# EAGLE board Kentec-pin-relayout (EAGLE 9.0.0)
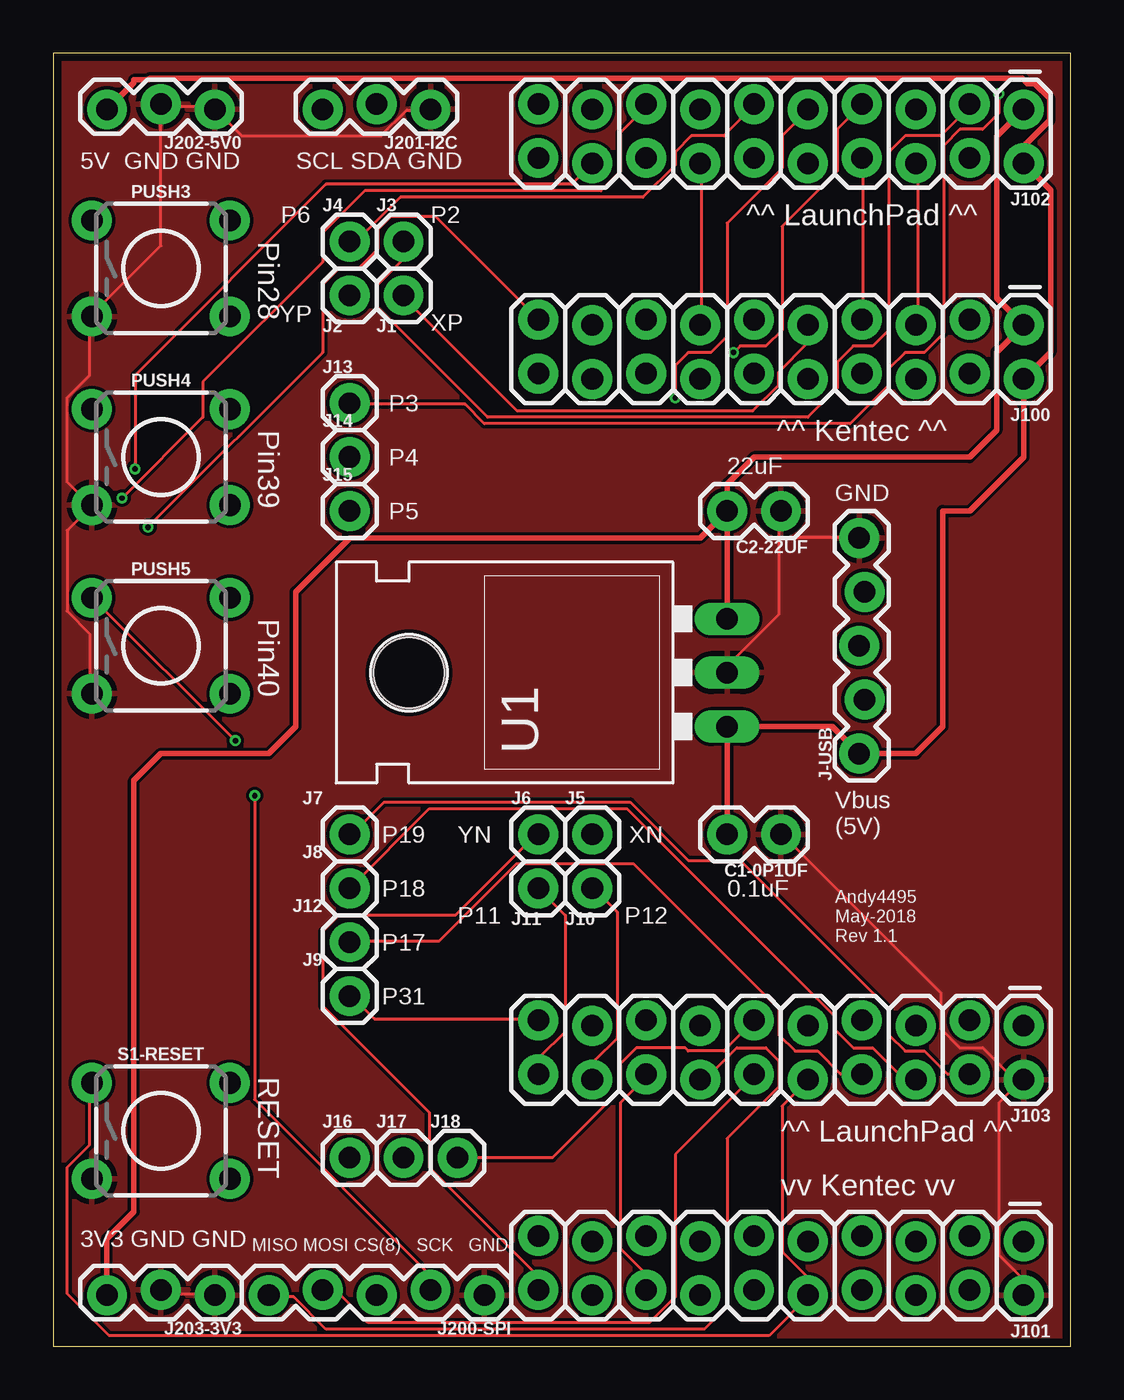
[diagram p0: board, top side]
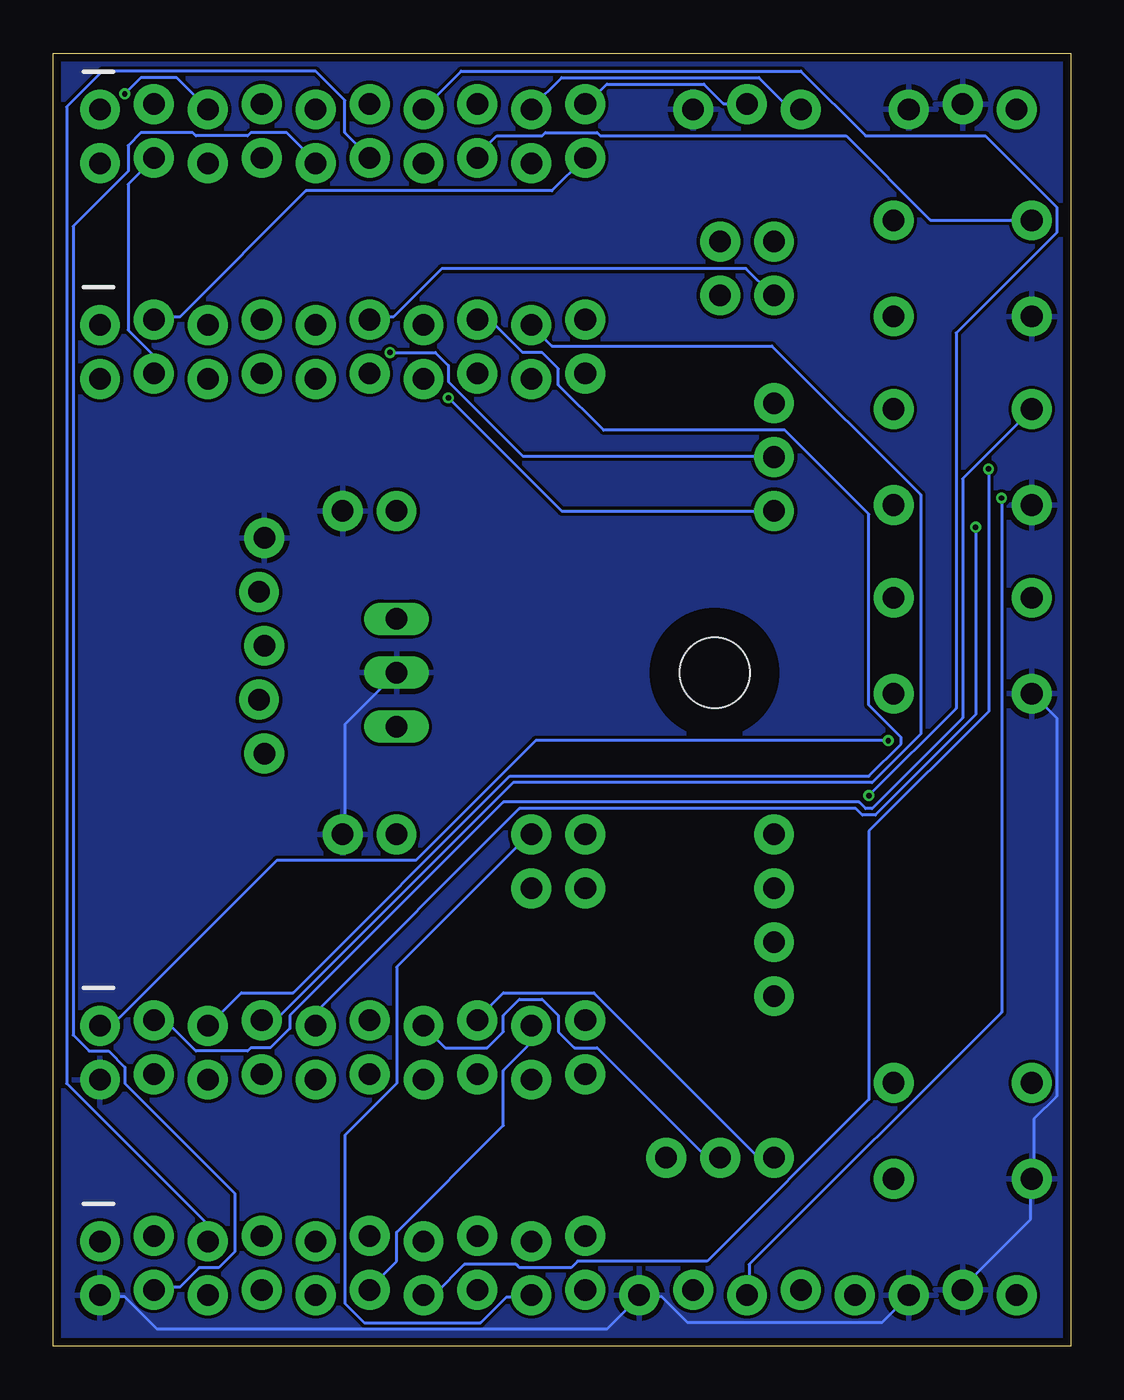
[diagram p1: board, bottom side, seen from below]

Size 47.93 x 60.95 mm. Coordinates in mm from the lower left corner, seen from the top.
Outline: 0,0 47.93,0 47.93,60.95 0,60.95 0,0
Copper layers (1*16): Top 0.035559375mm / dielectric 1.6mm / Bottom 0.035559375mm
Design rules "oshpark-2layer": minimum track width 6mil, minimum drill 10mil, track to track 6mil, track to pad 6mil, pad to pad 6mil, via to via 6mil, smd to smd 6mil, copper to edge 15mil, drill to drill 6mil, minimum pad ring 5mil, minimum via ring 5mil, stop-mask expansion 2.5mil, vias tented up to drill 0mil, thermal gap 10mil

## Footprints (pad centres in the part's own frame; a part is rotated, then mirrored left to right if it is on the bottom)
1X02 = drill 1.016 pad 1.88: 1 0,0; 2 2.54,0
1X01 = drill 1.016 pad 1.88: 1 0,0
2X10_LOCK = drill 1.016 pad 1.88: 1 0,0.127; 2 0,2.667; 3 2.54,-0.127; 4 2.54,2.413; 5 5.08,0.127; 6 5.08,2.667; 7 7.62,-0.127; 8 7.62,2.413; 9 10.16,0.127; 10 10.16,2.667; 11 12.7,-0.127; 12 12.7,2.413; 13 15.24,0.127; 14 15.24,2.667; 15 17.78,-0.127; 16 17.78,2.413; 17 20.32,0.127; 18 20.32,2.667; 19 22.86,-0.127; 20 22.86,2.413
1X05_LOCK = drill 1.016 pad 1.88: 1 0,0.127; 2 2.54,-0.127; 3 5.08,0.127; 4 7.62,-0.127; 5 10.16,0.127
1X03_LOCK = drill 1.016 pad 1.88: 1 0,0.127; 2 2.54,-0.127; 3 5.08,0.127
TACTILE_SWITCH_PTH_6.0MM = drill 1.016 pad 1.88: 1 -3.251,2.261; 2 3.251,2.261; 3 -3.251,-2.261; 4 3.251,-2.261
TO-220-ALT = drill 1.016 long: GND 0,-3.81; IN -2.54,-3.81; OUT 2.54,-3.81 | hole 3.302: 0,11.176

## Placement (x,y rotation side)
C1-0P1UF  [1X02]  34.29,24.13 180 top
C2-22UF  [1X02]  34.29,39.37 180 top
J1  [1X01]  16.51,49.53 0 top
J2  [1X01]  13.97,49.53 0 top
J3  [1X01]  16.51,52.07 0 top
J4  [1X01]  13.97,52.07 0 top
J5  [1X01]  25.4,24.13 0 top
J6  [1X01]  22.86,24.13 0 top
J7  [1X01]  13.97,24.13 0 top
J8  [1X01]  13.97,21.59 0 top
J9  [1X01]  13.97,16.51 0 top
J10  [1X01]  25.4,21.59 0 top
J11  [1X01]  22.86,21.59 0 top
J12  [1X01]  13.97,19.05 0 top
J13  [1X01]  13.97,44.45 0 top
J14  [1X01]  13.97,41.91 0 top
J15  [1X01]  13.97,39.37 0 top
J16  [1X01]  13.97,8.89 0 top
J17  [1X01]  16.51,8.89 0 top
J18  [1X01]  19.05,8.89 0 top
J100  Kentec J1-J3  [2X10_LOCK]  45.72,48.26 180 top
J101  Kentec J4-J2  [2X10_LOCK]  45.72,5.08 180 top
J102  LaunchPad J1-J3  [2X10_LOCK]  45.72,58.42 180 top
J103  LaunchPad J4-J2  [2X10_LOCK]  45.72,15.24 180 top
J200-SPI  [1X05_LOCK]  20.32,2.54 180 top
J201-I2C  [1X03_LOCK]  17.78,58.42 180 top
J202-5V0  [1X03_LOCK]  7.62,58.42 180 top
J203-3V3  [1X03_LOCK]  7.62,2.54 180 top
J-USB  [1X05_LOCK]  38.1,27.94 90 top
PUSH3  MOMENTARY-SWITCH-SPST-PTH-6.0MM  [TACTILE_SWITCH_PTH_6.0MM]  5.08,50.8 0 top
PUSH4  MOMENTARY-SWITCH-SPST-PTH-6.0MM  [TACTILE_SWITCH_PTH_6.0MM]  5.08,41.91 0 top
PUSH5  MOMENTARY-SWITCH-SPST-PTH-6.0MM  [TACTILE_SWITCH_PTH_6.0MM]  5.08,33.02 0 top
S1-RESET  MOMENTARY-SWITCH-SPST-PTH-6.0MM  [TACTILE_SWITCH_PTH_6.0MM]  5.08,10.16 0 top
U1  [TO-220-ALT]  27.94,31.75 90 top

## Library data of the parts
C1-0P1UF C2-22UF J1-J18 J100-J103 J200-SPI J201-I2C J202-5V0 J203-3V3 = SparkFun-Connectors
J-USB = SparkFun-Connectors; PIN1: Vcc; PIN5: GND
PUSH3-PUSH5 S1-RESET = SparkFun-Switches; PROD_ID: SWCH-08441; SF_SKU: COM-00097
U1 = SparkFun-IC-Power; PROD_ID: VREG-08450; SF_ID: COM-00107

## Nets
GND: C1-0P1UF.1 C2-22UF.1 J101.2 J103.2 J200-SPI.1 J201-I2C.1 J202-5V0.1 J202-5V0.2 J203-3V3.1 J203-3V3.2 J-USB.5 PUSH3.3 PUSH4.3 PUSH5.3 S1-RESET.3 U1.GND
N$1: J100.5 J102.6
N$2: J100.7 J102.8
N$3: J101.4 J102.10
N$4: J101.5 J102.12
N$5: J100.13 J102.14
N$6: J100.3 J102.20
N$7: J101.14 J102.18
N$8: J101.12 J103.17
N$9: J100.15 J103.5
N$10: J100.17 J103.7
N$11: J100.19 J103.9
N$12: J101.10 J103.10 S1-RESET.1
N$13: J102.15 J200-SPI.3
N$14: J102.13 J200-SPI.2
N$15: J100.4 J102.4
N$16: J1.1 J100.9
N$17: J2.1 J100.11
N$18: J5.1 J101.18
N$19: J102.16 PUSH3.1
N$20: J103.3 PUSH4.1
N$21: J103.1 PUSH5.1
N$22: J102.17 J201-I2C.3
N$23: J102.19 J201-I2C.2
N$24: J103.14 J200-SPI.5
N$25: J103.12 J200-SPI.4
N$26: J6.1 J101.20
N$27: J3.1 J102.3
N$28: J4.1 J102.11
N$29: J7.1 J103.4
N$30: J8.1 J103.6
N$31: J101.16 J103.16
N$32: J10.1 J103.18
N$33: J12.1 J103.8
N$34: J11.1 J103.20
N$35: J14.1 J102.7
N$36: J13.1 J102.5
N$37: J15.1 J102.9
N$38: J9.1 J103.19
N$39: J16.1 J103.15
N$40: J17.1 J103.13
N$41: J18.1 J103.11
VCC_1: C1-0P1UF.2 J100.2 J102.2 J202-5V0.3 J-USB.1 U1.IN
VCC_2: C2-22UF.2 J100.1 J102.1 J203-3V3.3 U1.OUT

## Tracks (layer width: path | path; a pad name or v marks a point on that pad's centre or on a via)
GND
  Top 0.152: 45.47,12.39 45.62,12.55 J103.2 45.47,12.39 | 45.47,12.39 44.55,11.48 44.55,4.32 45.62,3.25 45.62,2.49 J101.2 | U1.GND 31.75,32.05 34.19,34.49 34.19,38.15 | 34.19,38.15 34.19,39.37 C2-22UF.1 | 34.19,38.15 37.85,38.15 J-USB.5 | 45.47,12.39 43.79,14.07 42.72,14.07 41.81,14.99 41.81,16.66 34.34,24.13 C1-0P1UF.1 | J203-3V3.1 7.52,2.49 5.23,2.49 5.08,2.64 J203-3V3.2 | 5.08,58.42 7.52,58.42 J202-5V0.1 7.67,58.27 8.89,57.05 15.44,57.05 16.66,58.27 17.73,58.27 J201-I2C.1 | PUSH5.3 1.73,30.84 1.73,33.58 0.66,34.65 0.66,38.46 1.73,39.52 PUSH4.3 1.73,39.67 0.66,40.74 0.66,44.7 1.73,45.77 1.73,48.51 PUSH3.3 1.88,48.67 5.08,51.87 5.08,58.42 | 5.08,58.42 J202-5V0.2
  Bottom 0.152: U1.GND 34.19,29.31 34.19,24.13 C1-0P1UF.1 | J203-3V3.2 5.08,2.79 1.88,5.99 1.88,7.82 S1-RESET.3 1.73,7.98 1.73,10.72 0.66,11.79 0.66,29.62 1.73,30.68 PUSH5.3 | 20.32,2.34 19.25,2.34 18.03,1.12 8.89,1.12 7.67,2.34 J203-3V3.1 | 20.32,2.34 21.84,0.81 43.03,0.81 44.55,2.34 45.62,2.34 J101.2 | 20.32,2.34 J200-SPI.1
  pour Top: 0,60.96 48.26,60.96 48.26,0 0,0
  pour Bottom: 0,60.96 48.26,60.96 48.26,0 0,0
N$1
  Top 0.152: J100.5 40.74,48.21 40.74,55.68 J102.6
N$2
  Top 0.152: J100.7 38.15,48.51 38.15,55.98 J102.8
N$3
  Bottom 0.152: J101.4 43.18,2.79 41.96,2.79 41.05,3.71 40.13,3.71 39.37,4.47 39.37,7.21 44.55,12.39 44.55,13.16 45.31,13.92 46.23,13.92 46.99,14.68 46.99,52.78 44.4,55.37 44.4,56.59 43.79,57.2 41.35,57.2 41.2,57.05 38.76,57.05 38.61,57.2 36.93,57.2 35.56,55.83 J102.10
N$4
  Bottom 0.152: J101.5 40.74,5.08 40.74,5.84 47.3,12.39 47.3,58.42 45.62,60.1 35.56,60.1 34.19,58.72 34.19,57.2 33.12,56.13 J102.12
N$5
  Top 0.152: J100.13 30.53,48.21 30.53,55.68 J102.14
N$6
  Bottom 0.152: J100.3 43.18,48.51 41.96,48.51 36.02,54.46 24.43,54.46 22.91,55.98 J102.20
N$7  (via drill 0.25)
  Top 0.152: v3.86,41.35 3.86,45.77 12.85,54.76 24.43,54.76 25.35,55.68 J102.18
  Bottom 0.152: v3.86,41.35 3.86,29.92 9.5,24.28 9.5,11.63 17.12,4.01 23.22,4.01 23.52,3.71 25.96,3.71 26.11,3.86 28.55,3.86 29.92,2.49 30.38,2.49 J101.14
N$8
  Bottom 0.152: J103.17 25.5,14.99 25.5,14.22 26.72,13 26.72,10.41 31.75,5.38 31.75,4.01 32.97,2.79 J101.12
N$9
  Bottom 0.152: J100.15 27.94,48.36 27.33,48.36 25.81,46.84 24.89,46.84 24.13,46.08 24.13,45.31 22,43.18 13.46,43.18 9.5,39.22 9.5,30.23 7.98,28.7 7.98,28.4 9.5,26.87 26.42,26.87 36.63,16.66 39.07,16.66 40.59,15.14 J103.5
N$10
  Bottom 0.152: J103.7 38,15.44 37.39,15.44 26.26,26.57 9.35,26.57 7.06,28.85 7.06,40.13 14.07,47.14 24.43,47.14 25.35,48.06 J100.17
N$11  (via drill 0.25)
  Top 0.152: v4.47,38.61 12.7,46.84 12.7,50.04 13.46,50.8 14.38,50.8 15.29,51.71 15.29,52.63 15.9,53.24 18.03,53.24 22.76,48.51 J100.19
  Bottom 0.152: J103.9 35.56,15.75 25.96,25.35 10.11,25.35 9.8,25.04 9.2,25.04 4.47,29.77 v4.47,38.61
N$12
  Top 0.152: J103.10 35.56,12.55 34.34,11.33 34.34,4.47 35.56,3.25 J101.10 35.56,2.34 33.73,0.51 2.64,0.51 0.66,2.49 0.66,8.43 1.73,9.5 1.73,12.39 S1-RESET.1
N$13  (via drill 0.25)
  Top 0.152: v3.25,39.98 7.06,43.79 7.06,45.47 12.7,51.11 12.7,52.48 14.68,54.46 25.81,54.46 26.72,55.37 26.72,57.2 27.94,58.42 J102.15
  Bottom 0.152: v3.25,39.98 3.25,15.75 15.14,3.86 15.14,2.49 J200-SPI.3
N$14  (via drill 0.25)
  Top 0.152: v9.5,25.96 9.5,11.63 17.73,3.4 17.73,2.79 J200-SPI.2
  Bottom 0.152: v9.5,25.96 5.39,30.07 5.39,47.75 0.66,52.48 0.66,53.7 4.01,57.05 9.65,57.05 12.7,60.1 28.7,60.1 30.38,58.42 J102.13
N$15
  Bottom 0.152: J100.4 43.18,46.69 44.4,47.9 44.4,54.76 43.18,55.98 J102.4
N$16
  Top 0.152: J100.9 35.56,47.3 34.19,45.92 34.19,45.31 32.97,44.09 21.84,44.09 16.51,49.43 J1.1
N$17
  Bottom 0.152: J100.11 32.97,48.51 31.9,48.51 29.62,50.8 15.29,50.8 14.07,49.58 J2.1
N$18
  Bottom 0.152: J101.18 25.5,2.34 26.57,2.34 27.79,1.12 33.27,1.12 34.19,2.03 34.19,9.96 31.75,12.39 31.75,17.88 25.5,24.13 J5.1
N$19
  Bottom 0.152: PUSH3.1 1.88,53.09 6.6,53.09 10.57,57.05 22.15,57.05 22.3,57.2 24.74,57.2 24.89,57.05 27.03,57.05 27.94,56.13 J102.16
N$20
  Bottom 0.152: J103.3 43.18,15.29 42.57,15.29 41.2,13.92 38.76,13.92 38.61,14.07 37.69,14.07 36.78,14.99 36.78,15.6 26.72,25.65 9.96,25.65 9.65,25.35 9.35,25.35 5.08,29.62 5.08,40.89 1.88,44.09 PUSH4.1
N$21  (via drill 0.25)
  Top 0.152: v8.59,28.55 1.88,35.25 PUSH5.1
  Bottom 0.152: v8.59,28.55 25.2,28.55 30.84,22.91 37.39,22.91 45.16,15.14 45.62,15.14 J103.1
N$22
  Bottom 0.152: J201-I2C.3 12.7,58.42 13.31,58.42 14.68,59.79 23.98,59.79 25.35,58.42 J102.17
N$23
  Bottom 0.152: J201-I2C.2 15.29,58.57 16.36,58.57 17.27,59.49 21.84,59.49 22.76,58.57 J102.19
N$24
  Top 0.152: J200-SPI.5 10.26,2.34 11.33,2.34 12.85,0.81 30.68,0.81 31.75,1.88 31.75,9.8 34.19,12.24 34.19,13.46 33.58,14.07 32.21,14.07 30.84,12.7 30.53,12.7 J103.14
N$25
  Top 0.152: J200-SPI.4 12.7,2.64 13.31,2.64 14.83,1.12 28.09,1.12 29.31,2.34 29.31,9.04 32.97,12.7 J103.12
N$26
  Top 0.152: J101.20 22.76,2.79 22.76,3.4 17.73,8.43 17.73,11.02 12.7,16.05 12.7,19.56 13.46,20.32 18.95,20.32 22.76,24.13 J6.1
N$27
  Top 0.152: J3.1 16.51,51.26 15.29,50.04 15.29,48.97 20.47,43.79 35.56,43.79 36.93,45.16 36.93,46.38 37.69,47.14 38.61,47.14 39.37,47.9 39.37,56.29 40.13,57.05 41.81,57.05 43.18,58.42 J102.3
N$28
  Top 0.152: J4.1 14.07,52.17 14.38,52.17 16.36,54.15 27.79,54.15 29.31,55.68 29.31,56.29 30.07,57.05 31.6,57.05 32.97,58.42 J102.11
N$29
  Top 0.152: J103.4 43.18,12.85 42.11,12.85 41.05,13.92 40.13,13.92 39.37,14.68 39.37,15.9 32.36,22.91 29.92,22.91 27.18,25.65 15.6,25.65 14.07,24.13 J7.1
N$30
  Top 0.152: J8.1 17.73,25.35 27.03,25.35 36.78,15.6 36.78,14.99 37.69,14.07 38.61,14.07 39.98,12.7 40.59,12.7 J103.6
N$31
  Top 0.152: J101.16 27.94,3.4 26.72,4.62 26.72,11.48 27.94,12.7 J103.16
N$32
  Top 0.152: J103.18 25.5,12.7 25.5,13.46 26.57,14.53 26.57,20.47 25.5,21.54 J10.1
N$33
  Top 0.152: J103.8 38,12.85 37.08,12.85 36.02,13.92 34.95,13.92 34.19,14.68 34.19,15.9 27.33,22.76 21.84,22.76 18.19,19.1 14.07,19.1 J12.1
N$34
  Top 0.152: J11.1 24.13,20.32 24.13,14.83 22.91,13.61 22.91,12.85 J103.20
N$35  (via drill 0.25)
  Top 0.152: v32.05,46.84 32.36,47.14 33.58,47.14 34.34,47.9 34.34,52.78 36.93,55.37 36.93,57.35 38,58.42 J102.7
  Bottom 0.152: v32.05,46.84 29.92,46.84 29.31,46.23 29.31,45.47 25.81,41.96 14.07,41.96 J14.1
N$36  (via drill 0.25)
  Top 0.152: v44.55,59.03 44.55,58.11 43.79,57.35 42.72,57.35 41.96,56.59 41.96,47.75 41.05,46.84 40.13,46.84 39.37,46.08 39.37,45.31 37.54,43.48 20.32,43.48 19.41,44.4 14.07,44.4 J13.1
  Bottom 0.152: v44.55,59.03 43.79,59.79 42.11,59.79 40.74,58.42 J102.5
N$37  (via drill 0.25)
  Top 0.152: v29.31,44.7 29.31,46.23 29.92,46.84 30.99,46.84 31.75,47.6 31.75,52.93 34.34,55.52 34.34,57.05 35.56,58.27 J102.9
  Bottom 0.152: J15.1 23.98,39.37 v29.31,44.7
N$38
  Top 0.152: J103.19 22.76,15.44 15.14,15.44 14.07,16.51 J9.1
N$39
  Bottom 0.152: J16.1 14.68,8.89 22.45,16.66 26.72,16.66 27.94,15.44 J103.15
N$40
  Bottom 0.152: J17.1 17.12,8.89 22.3,14.07 23.37,14.07 24.13,14.83 24.13,15.6 24.89,16.36 25.96,16.36 26.72,15.6 26.72,14.83 27.48,14.07 29.46,14.07 30.38,14.99 J103.13
N$41
  Top 0.152: J18.1 23.52,8.89 26.72,12.09 26.72,13.31 27.48,14.07 29.77,14.07 29.92,13.92 31.6,13.92 32.97,15.29 J103.11
VCC_1
  Top 0.254: C1-0P1UF.2 U1.IN 36.7,29.21 J-USB.1 40.64,27.94 41.91,29.21 41.91,39.37 43.18,39.37 45.72,41.91 J100.2 46.99,46.86 46.99,54.48 J102.2 45.72,56.57 46.94,57.79 46.94,58.8 46.23,59.51 45.9,59.51 45.64,59.77 4.58,59.77 4.5,59.69 3.81,59.69 3.81,59.56 J202-5V0.3
VCC_2
  Top 0.254: C2-22UF.2 31.75,40.64 33.02,41.91 43.18,41.91 44.45,43.18 44.45,46.86 J100.1 44.45,49.4 44.45,57.02 J102.1 | C2-22UF.2 U1.OUT | J203-3V3.3 2.54,5.08 3.81,6.35 3.81,26.67 5.08,27.94 10.16,27.94 11.43,29.21 11.43,35.56 13.97,38.1 30.48,38.1 C2-22UF.2

## Text on the board
tPlace: 5V GND GND | SCL SDA GND | P6 | P2 | ^^ LaunchPad ^^ | Pin28 | YP | XP | P3 | Pin39 | ^^ Kentec ^^ | P4 | 22uF | GND | P5 | Pin40 | P19 | YN | XN | Vbus / (5V) | P18 | 0.1uF | P11 | P12 | P17 | Andy4495 / May-2018 / Rev 1.1 | P31 | RESET | ^^ LaunchPad ^^ | vv Kentec vv | 3V3 GND GND | MISO MOSI CS(8) SCK GND